# Altium PCB swivel_rev2_1.PcbDoc
Units mm, origin at the board's own origin, x right, y up, seen from the top; angles counter-clockwise.
Board outline 50 x 70 mm, 2 copper layers (Top Layer, Bottom Layer); 44 components, 36 nets, 174 pads, 19 vias.
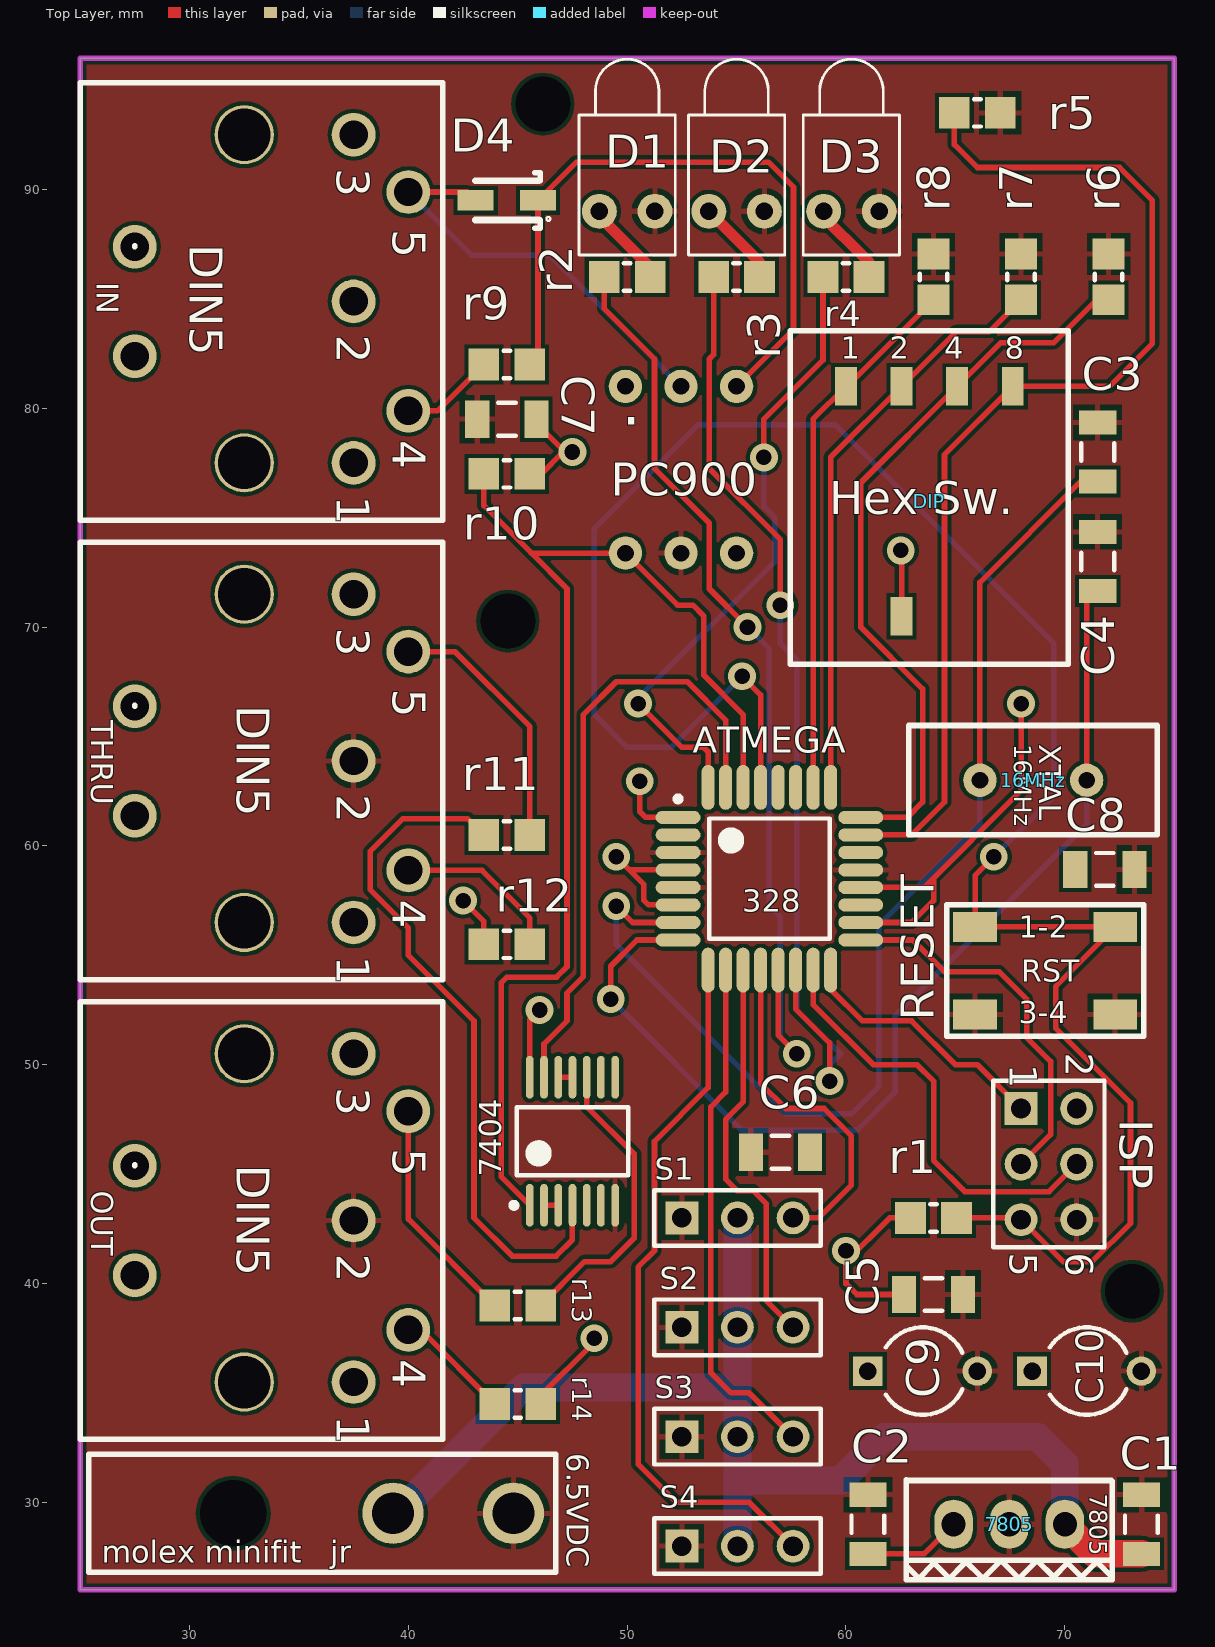
[diagram p0: Top Layer view]
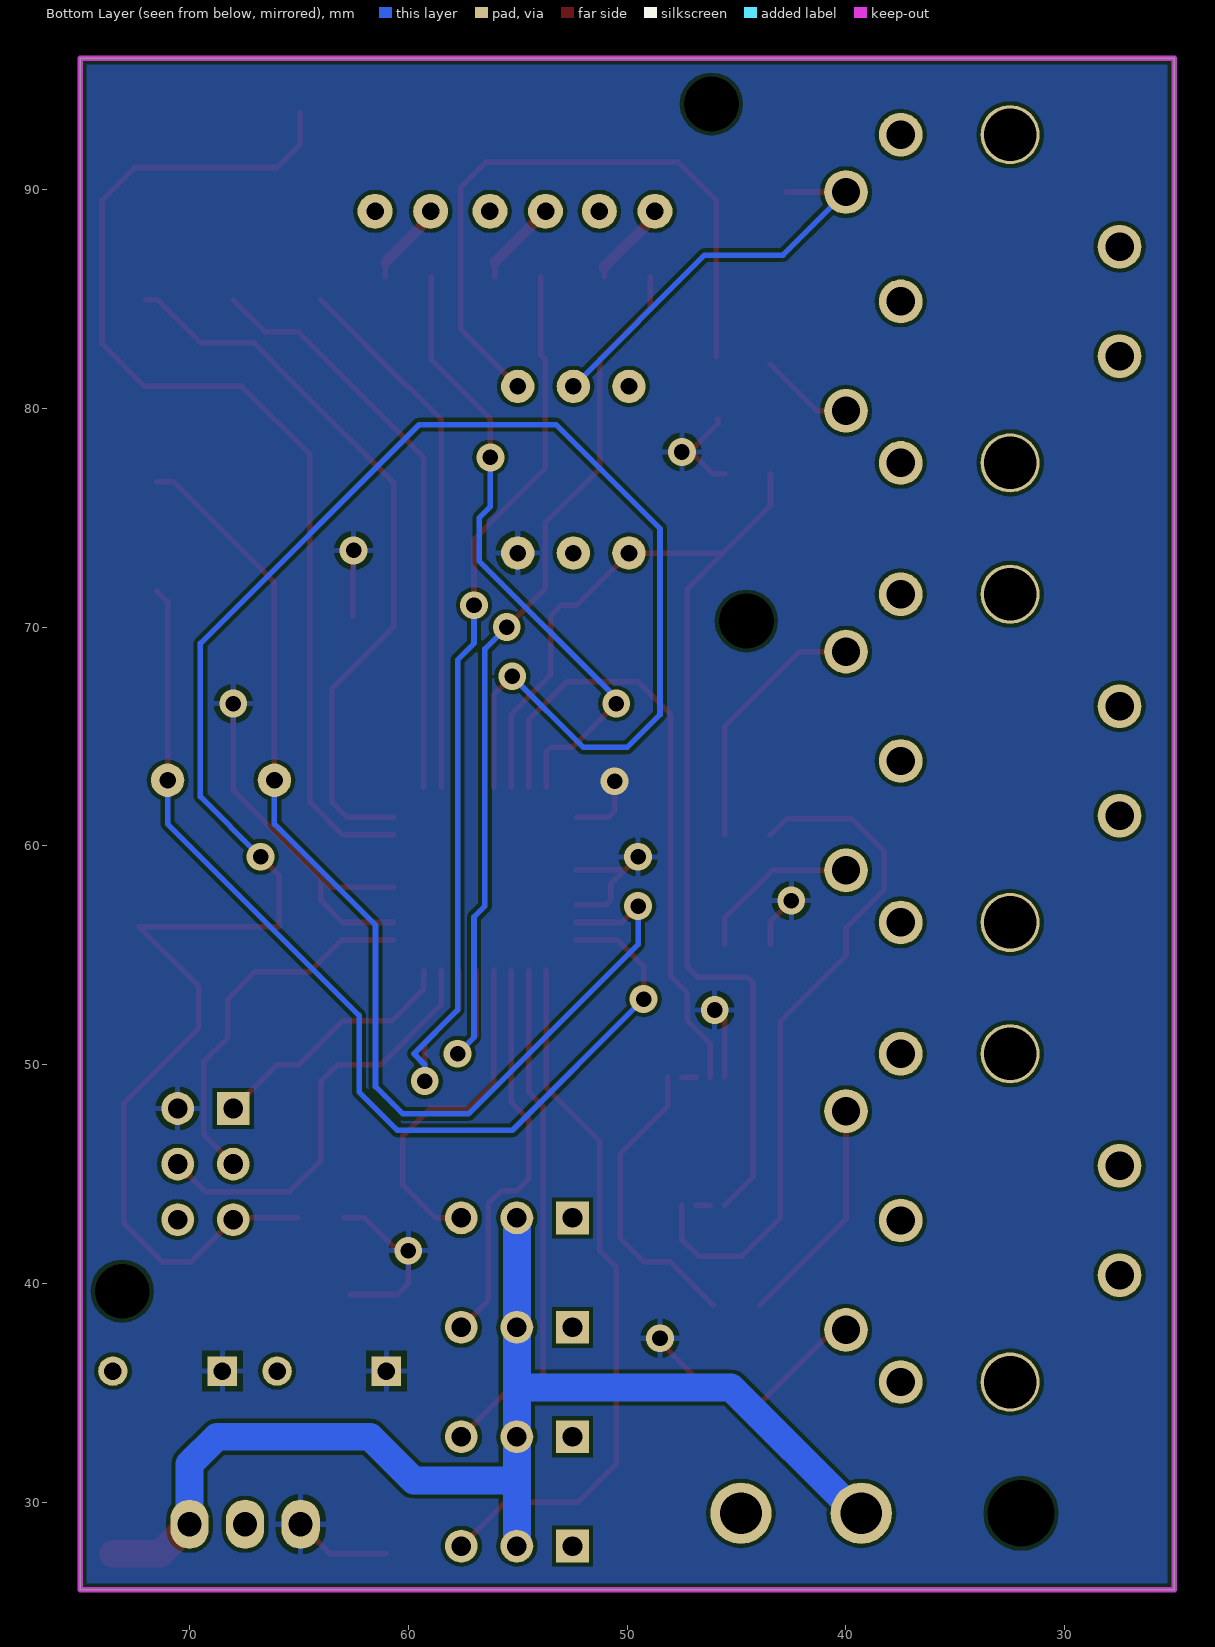
[diagram p1: Bottom Layer view, seen from below]

## Layer stack, top to bottom
Top Layer: signal copper 0.0356
Dielectric: dielectric 0.32, FR-4, Dk 4.8
Bottom Layer: signal copper 0.0356

## Board outline
25,96 75,96 75,26 25,26

## Design rules (kind name [scope] priority, off if disabled: settings)
Clearance [All] p1: gap=0.178
PolygonConnect [All] p1: connectstyle=Relief reliefconductorwidth=0.254 reliefentries=4 polygonreliefangle="90 Angle" airgapwidth=0.254
RoutingVias [All] p1: holewidth=0.711 width=1.27 viastyle="Through Hole" minholewidth=0.711 minwidth=1.27 maxholewidth=0.711 maxwidth=1.27
SilkscreenOverComponentPads [All] p1: minsilkscreentomaskgap=0.254
SolderMaskExpansion [All] p1: expansion=0.102
Width [All] p1: maxlimit=1.27 minlimit=0.254 preferedwidth=0.254
27 further rules are at their usual default settings.

## Components (designator, comment, footprint, x,y, rotation, side; value= is the part's Value field where it differs from the comment)
6.5VDC "Big Molex" "2-Pin Big Molex" 32,29.5 r270 top (schematic designator P_IN)
16MHz "XTAL" XTAL 71,63 r180 top
7404 "7404" "7404 TSSOP" 47.5,46.5 r90 top (schematic designator "Hex Inverter")
7805 "7805" 7805 70,29 r180 top (schematic designator VREG)
ATMEGA "32 TQFP" ATMEGA328 56.5,58.5 r0 top (schematic designator AVR)
C1 "Cap Semi" C1206 73.5,29 r270 top
C2 "Cap Semi" C1206 61,29 r270 top
C3 "Cap Semi" C1206 71.5,78 r90 top
C4 "Cap Semi" C1206 71.5,73 r90 top
C5 "Cap Semi" C1206 64,39.5 r180 top
C6 "Cap Semi" C1206 57,46 r0 top
C7 "Cap Semi" C1206 44.5,79.5 r0 top
C8 "Cap Semi" C1206 71.825,58.925 r180 top
C9 "Cap2" CAPR5-4X5 63.5,36 r0 top
C10 "Cap2" CAPR5-4X5 71,36 r0 top
D1 "LED1" LED-1 50,89 r90 top
D2 "LED1" LED-1 55,89 r90 top
D3 "LED1" LED-1 60.25,89 r90 top
D4 "1N4148" 1N4148W-FDITR-ND 44.5,89.5 r180 top
DIP "Dip_hex" DIP_Hex 60,81 r0 top
IN "DIN5" DIN5 37.5,92.5 r270 top (schematic designator "MIDI IN")
ISP "Header 3X2" HDR2X3 68,48 r270 top
OUT "DIN5" DIN5 37.5,50.5 r270 top (schematic designator "MIDI OUT")
PC900 "PC900" PC900 55,81 r180 top (schematic designator OPTO)
r1 "10k" "Resistor 0805" 64,43 r180 top
r2 "220" "Resistor 0805" 50,86 r0 top
r3 "220" "Resistor 0805" 55,86 r0 top
r4 "220" "Resistor 0805" 60,86 r0 top
r5 "10k" "Resistor 0805" 66,93.5 r0 top
r6 "10k" "Resistor 0805" 72,86 r90 top
r7 "10k" "Resistor 0805" 68,86 r90 top
r8 "10k" "Resistor 0805" 64,86 r90 top
r9 "220" "Resistor 0805" 44.5,82 r0 top
r10 "270" "Resistor 0805" 44.5,77 r0 top
r11 "220" "Resistor 0805" 44.5,60.5 r0 top
r12 "220" "Resistor 0805" 44.5,55.5 r0 top
r13 "220" "Resistor 0805" 45,39 r0 top
r14 "220" "Resistor 0805" 45,34.5 r0 top
RESET "RESET" Reset 67,53 r0 top (schematic designator RST)
S1 "Header 3" HDR1X3 52.5,43 r0 top (schematic designator P4)
S2 "Header 3" HDR1X3 52.5,38 r0 top (schematic designator P3)
S3 "Header 3" HDR1X3 52.5,33 r0 top (schematic designator P2)
S4 "Header 3" HDR1X3 52.5,28 r0 top (schematic designator P1)
THRU "DIN5" DIN5 37.5,71.5 r270 top (schematic designator "MIDI THRU")

## Footprints (in the part's own frame and the unit in brackets; to place one, negate y for a bottom-side part, rotate by r counter-clockwise, add the part's x,y. Pads: shape width x height; smd on the part's side, far side on the other; paste and mask are expansions set on the pad)
1N4148W-FDITR-ND [mm] "Digikey part 1N4148W-FDITR-ND diode"
  rect 1.65x0.95 smd: 1(-1.425,0) 2(1.425,0)
  silkscreen extent -1.99,-1.27 1.45,1.27, body extent -1.43,-0.85 1.42,0.85, height 1.35
"2-Pin Big Molex" [mm] "Molex 70555-0037"
  round 2.8 hole 1.905: 1(0,7.3) 2(0,12.802)
  round 0 hole 3.048 unplated: ""(0,0)
  silkscreen extent -2.7,-6.6 2.7,14.73
"7404 TSSOP" [mm] "TSOP, 14-Leads, Body 5.1x4.5mm (max), Pitch 0.65mm, IPC Medium Density"
  oval 1.95x0.35 smd: 1(-2.925,1.95) 2(-2.925,1.3) 3(-2.925,0.65) 4(-2.925,0) 5(-2.925,-0.65) 6(-2.925,-1.3) 7(-2.925,-1.95) 8(2.925,-1.95) 9(2.925,-1.3) 10(2.925,-0.65) 11(2.925,0) 12(2.925,0.65) 13(2.925,1.3) 14(2.925,1.95)
  silkscreen extent -3.05,-2.55 1.55,2.8, body extent -2.25,-2.55 2.25,2.55, height 1.1
7805 [mm] "to220 package"
  oval 1.75x2.25 hole 1.1: COM(2.54,0) IN(0,0) OUT(5.08,0)
  silkscreen extent -2.16,-2.03 7.24,2.54
ATMEGA328 [mm] "TQFP, 32-Leads, Body 9.3x9.3mm (max), Pitch 0.80mm, IPC Low Density"
  oval 2.05x0.6 smd: 1(-4.175,2.8) 2(-4.175,2) 3(-4.175,1.2) 4(-4.175,0.4) 5(-4.175,-0.4) 6(-4.175,-1.2) 7(-4.175,-2) 8(-4.175,-2.8) 17(4.175,-2.8) 18(4.175,-2) 19(4.175,-1.2) 20(4.175,-0.4) 21(4.175,0.4) 22(4.175,1.2) 23(4.175,2) 24(4.175,2.8)
  oval 0.6x2.05 smd: 9(-2.8,-4.175) 10(-2,-4.175) 11(-1.2,-4.175) 12(-0.4,-4.175) 13(0.4,-4.175) 14(1.2,-4.175) 15(2,-4.175) 16(2.8,-4.175) 25(2.8,4.175) 26(2,4.175) 27(1.2,4.175) 28(0.4,4.175) 29(-0.4,4.175) 30(-1.2,4.175) 31(-2,4.175) 32(-2.8,4.175)
  silkscreen extent -4.3,-2.75 2.75,3.77, body extent -3.5,-3.5 3.5,3.5, height 1.2
C1206 [mm] "Chip Capacitor, Body 3.2x1.6mm, IPC High Density"
  rect 1.1x1.7 smd: 1(-1.35,0) 2(1.35,0)
  silkscreen extent -0.4,-0.75 0.4,0.75, body extent -1.7,-0.9 1.7,0.9, height 1.3
CAPR5-4X5 [mm] "Capacitor; 2 Leads"
  rect 1.35x1.35 hole 0.8: 1(-2.5,0)
  round 1.35 hole 0.8: 2(2.5,0)
  silkscreen extent -1.69,-2 1.82,2
DIN5 [mm] "SDS-51J Digi: CP-2350-ND"
  round 2 hole 1.3: 1(15,0) 2(7.62,0) 3(0,0) 4(12.62,2.5) 5(2.62,2.5) 6(5.12,-10) 7(10.12,-10)
  round 2.7 hole 2.4: 8(0,-5) 9(15,-5)
  silkscreen extent -2.38,-12.5 17.62,4.06
DIP_Hex [mm] "Digi part 360 2212 2 ND"
  rect 1x1.75 smd: 1(0,0) 1(0,0) 2(2.54,0) 4(5.08,0) 8(7.62,0) C(2.54,-10.5)
  silkscreen extent -2.54,-12.7 10.16,2.54
HDR1X3 [mm] "Connector; Header; 3 Position"
  rect 1.5x1.5 hole 0.9: 1(0,0)
  round 1.5 hole 0.9: 2(2.54,0) 3(5.08,0)
  silkscreen extent -1.27,-1.27 6.35,1.27
HDR2X3 [mm] "Connector; Header; 3x2 Position"
  rect 1.5x1.5 hole 0.9: 1(0,0)
  round 1.5 hole 0.9: 2(0,2.54) 3(2.54,0) 4(2.54,2.54) 5(5.08,0) 6(5.08,2.54)
  silkscreen extent -1.27,-1.27 6.35,3.81
LED-1 [mm] "LED; 2 Leads"
  round 1.6 hole 0.8: 1(0,1.27) 2(0,-1.27)
  silkscreen extent -2,-2.2 6.95,2.2
PC900 [mil] "DIP6 Optoisolator"
  round 60 hole 30: 1(0,0) 2(100,0) 3(200,0) 4(0,300) 5(100,300) 6(200,300)
Reset [mm] "SMD Switch"
  rect 2x1.375 smd: 1(-1.1,3.3) 2(5.3,3.3) 3(-1.1,-0.7) 4(5.3,-0.7)
  silkscreen extent -2.4,-1.7 6.6,4.3
"Resistor 0805" [mm] "Chip Resistor, 2-Leads, Body 2.0x1.3mm, IPC Low Density"
  rect 1.4x1.45 smd: 1(-1.05,0) 2(1.05,0)
  silkscreen extent -0.15,-0.63 0.15,0.63, body extent -1.1,-0.67 1.1,0.67, height 0.7
XTAL [mil] "HC49"
  round 60 hole 30: 1(0,0) 2(192.13,0)
  silkscreen extent -127,-98 320,98

## Part data
6.5VDC: library part "2-Pin Big Molex", "Molex 39-30-1020"
C1 C2 C3 C4 C5 C6 C7 C8: "Capacitor (Semiconductor SIM Model)"
C9 C10: "Capacitor"
D1 D2 D3: "Typical RED GaAs LED"
ISP: "Header, 3-Pin, Dual row"
r1 r2 r3 r4 r5 r6 r7 r8 r9 r10 r11 r12 r13 r14: library part res0805
S1 S2 S3 S4: "Header, 3-Pin"

## Free pads (board coordinates)
  round 1.524 hole 2.5: 0(44.55,70.275) 0(46.15,93.9) 0(73.075,39.65)

## Via types
v1: diameter 1.27, hole 0.711, Top Layer to Bottom Layer, 19 vias

## Nets (pads, with @x,y where several pads share a name; then routed paths per layer and width w, separated by ;. In a path a pad name is that pad's centre, name@x,y a point inside that pad or via, vN(x,y) a via of type N, cw(c..) or ccw(c..) an arc to the next point about the centre after c; other vN are vias at no path point)
CAT: D4.2 IN.5 PC900.2 | length 18.8
  Top Layer w0.254: IN.5 D4.2@42.695,89.88
  Bottom Layer w0.254: IN.5 42.88,87 46.46,87 PC900.2
GND: 6.5VDC.2 7404.7 7805.COM ATMEGA.3 ATMEGA.5 ATMEGA.21 C1.1 C2.1 C3.2 C4.2 C5.1 C6.1 C7.1 C8.1 C9.2 C10.2 D1.2 D2.2 D3.2 ISP.6 OUT.2 PC900.5 r5.2 r6.2 r7.2 r8.2 RESET.3 RESET.4 S1.1 S2.1 S3.1 S4.1 THRU.2
MISO: ATMEGA.16 ISP.1 | length 11.8
  Top Layer w0.254: ATMEGA.16 59.3,53.45 60.75,52 63,52 65,50 66,50 ISP.1
MOSI: ATMEGA.15 ISP.4 | length 19.8
  Top Layer w0.254: ATMEGA.15 58.5,52.75 61.25,50 63.25,50 64,49.25 64,45.625 65.425,44.2 69.28,44.2 ISP.4
NetAVR_13: ATMEGA.13 r2.1 | length 43.3
  Top Layer w0.254: r2.1 48.95,84.55 51.25,82.25 51.25,77.25 53.75,74.75 53.75,71.75 v1(55.5,70) ; ATMEGA.13 56.9,51.35 v1(57.75,50.5)
  Bottom Layer w0.254: v1(55.5,70) 56.5,69 56.5,57.25 57,56.75 57,51.25 v1(57.75,50.5)
NetAVR_14: ATMEGA.14 r3.1 | length 45
  Top Layer w0.254: r3.1 53.95,82.45 53.75,82.25 53.75,77.25 57,74 v1@57,71.25 ; ATMEGA.14 57.7,52.55 59.25,51 v1(59.25,49.25)
  Bottom Layer w0.254: v1(57,71) 57,69.25 57.75,68.5 57.75,52.5 59.75,50.5 59.25,50 v1(59.25,49.25)
NetAVR_32: ATMEGA.32 r4.1 | length 29.2
  Top Layer w0.254: v1(50.5,66.5) 52.5,64.5 53.5,64.5 53.7,64.3 ATMEGA.32 ; v1(56.25,77.75) 56.25,79.5 58.95,82.2 r4.1
  Bottom Layer w0.254: v1(50.5,66.5) 50.5,66.75 56.75,73 56.75,75 56.25,75.5 v1(56.25,77.75)
NetD1_1: D1.1 r2.2 | length 4
  Top Layer w0.254: r2.2 r2.2@51.05,86.45
  Top Layer w0.508: D1.1 48.73,88.77 r2.2@51.05,86.45
NetD2_1: D2.1 r3.2 | length 4
  Top Layer w0.254: r3.2 r3.2@56.05,86.68
  Top Layer w0.508: D2.1 r3.2@56.05,86.68
NetD3_1: D3.1 r4.2 | length 4
  Top Layer w0.254: r4.2 r4.2@61.05,86.68
  Top Layer w0.508: D3.1@58.73,89 r4.2@61.05,86.68
NetD4_1: D4.1 PC900.1 r9.2 | length 30.2
  Top Layer w0.254: r9.2@45.925,82.375 D4.1 47.675,91.25 56.45,91.25 57.6,90.1 57.6,83.6 PC900.1
"NetHex Inverter_2": 7404.2 7404.3 | length 0.6
  Top Layer w0.254: 7404.2 7404.3
"NetHex Inverter_4": 7404.4 r11.1 | length 32
  Top Layer w0.254: r11.1 42.7,61.25 39.75,61.25 38.25,59.75 38.25,58 40,56.25 40,55 43,52 43,43 44.75,41.25 46.75,41.25 47.5,42 7404.4
"NetHex Inverter_10": 7404.10 r13.2 | length 13.8
  Top Layer w0.254: r13.2 48.05,41 49.25,41 50.325,42.075 50.325,45.925 48.15,48.1 7404.10
"NetHex Inverter_11": 7404.11 7404.12 | length 0.7
  Top Layer w0.254: 7404.12 7404.11
"NetMIDI IN_4": IN.4 r9.1 | length 4.3
  Top Layer w0.254: IN.4 41.33,79.88 r9.1
"NetMIDI OUT_4": OUT.4 r14.1 | length 5.4
  Top Layer w0.254: OUT.4 40.57,37.88 r14.1
"NetMIDI OUT_5": OUT.5 r13.1 | length 10.5
  Top Layer w0.254: OUT.5 40,42.95 r13.1
"NetMIDI THRU_4": r12.2 THRU.4 | length 7.7
  Top Layer w0.254: THRU.4 43.37,58.88 45.55,56.7 r12.2
"NetMIDI THRU_5": r11.2 THRU.5 | length 11.9
  Top Layer w0.254: THRU.5 42.12,68.88 45.55,65.45 r11.2
RST: ATMEGA.29 ISP.5 r1.1 RESET.1 RESET.2 | length 96.2
  Top Layer w0.254: v1(55.25,67.75) 56.1,66.9 ATMEGA.29 ; r1.1 67.92,43 ISP.5 69.92,41 71.25,41 73,42.75 73,48.25 69.575,51.675 69.575,53.575 RESET.2 RESET.1 65.9,58.65 v1(66.75,59.5)
  Bottom Layer w0.254: v1(55.25,67.75) 52,64.5 50,64.5 48.5,66 48.5,74.5 53.25,79.25 59.5,79.25 69.5,69.25 69.5,62.25 v1(66.75,59.5)
RX: 7404.1 ATMEGA.30 PC900.6 r10.1 | length 55.8
  Top Layer w0.254: r10.1 43.45,75.55 45.62,73.38 ; 7404.1 44.25,44.875 44.25,53.75 44.5,54 46.775,54 47.25,54.475 47.25,71.75 45.62,73.38 ; ATMEGA.30 55.3,66 53.5,67.8 53.5,70.5 53,71 52.3,71 PC900.6 45.62,73.38
S1: ATMEGA.9 S4.3 | length 32.5
  Top Layer w0.254: ATMEGA.9 53.7,48.95 51.25,46.5 51.25,41.5 50.5,40.75 50.5,31.75 52.25,30 55.58,30 S4.3
S2: ATMEGA.10 S3.3 | length 23.6
  Top Layer w0.254: ATMEGA.10 54.5,48.75 53.825,48.075 53.825,35.925 54.75,35 55.58,35 S3.3
S3: ATMEGA.11 S2.3 | length 18.4
  Top Layer w0.254: ATMEGA.11 55.3,48.3 54.5,47.5 54.5,44.775 55.025,44.25 55.75,44.25 56.35,43.65 56.35,39.23 S2.3
S4: ATMEGA.12 S1.3 | length 15.9
  Top Layer w0.254: ATMEGA.12 56.1,49.15 57.25,48 59,48 60.25,46.75 60.25,44.5 58.75,43 S1.3
SCK: ATMEGA.17 ISP.3 | length 17.2
  Top Layer w0.254: ATMEGA.17 63.05,55.7 64.5,54.25 67,54.25 68.25,53 68.25,51.25 69.35,50.15 69.35,46.81 ISP.3
SPOW: 6.5VDC.1 7805.IN C1.2 S1.2 S2.2 S3.2 S4.2 | length 56.2
  Top Layer w1.27: 7805.IN 71.35,27.65 C1.2
  Bottom Layer w1.27: 6.5VDC.1 39.5,29.5 45.25,35.25 55.04,35.25 ; S4.2 55.04,31 ; S1.2 S2.2 55.04,35.25 ; 7805.IN 70,31.75 68.75,33 61.75,33 59.75,31 55.04,31 ; 55.04,31 S3.2 55.04,35.25
SW1: ATMEGA.23 DIP.8 r5.1 | length 50
  Top Layer w0.254: ATMEGA.23 63,60.5 64.5,62 64.5,77.88 DIP.8 72.05,81 74,82.95 74,89.5 72.5,91 66,91 64.95,92.05 r5.1
SW2: ATMEGA.24 DIP.4 r6.1 | length 33.7
  Top Layer w0.254: ATMEGA.24 62.8,61.3 63.5,62 63.5,67.175 60.675,70 60.675,76.595 DIP.4 67.08,83 69.5,83 71.45,84.95 r6.1
SW3: ATMEGA.25 DIP.2 r7.1 | length 26.8
  Top Layer w0.254: ATMEGA.25 59.3,77.76 DIP.2 65.04,83.5 66.55,83.5 r7.1
SW4: ATMEGA.26 DIP.1 r8.1 | length 24.6
  Top Layer w0.254: ATMEGA.26 58.5,79.5 60,81 60.05,81 r8.1
TX: 7404.13 ATMEGA.31 | length 28.2
  Top Layer w0.254: 7404.13 46.2,50.95 47.25,52 47.25,53.275 48,54.025 48,66 49.5,67.5 52.75,67.5 54.5,65.75 ATMEGA.31
VCC: 7404.14 7805.OUT ATMEGA.4 ATMEGA.6 ATMEGA.18 ATMEGA.20 C2.2 C5.2 C6.2 C7.2 C8.2 C9.1 C10.1 DIP.C ISP.2 PC900.4 r1.2 r10.2 r12.1 r14.2 | length 52.6
  Top Layer w0.254: v1(42.5,57.5) 43.45,56.55 r12.1 ; 7404.14 45.55,52.05 ; r10.2 46.075,77 47.075,78 v1(47.5,78) 47.15,78 45.85,79.3 C7.2 ; r14.2@46.025,34.85 v1@48.475,37.3 ; v1(49.5,59.5) 50.1,58.9 ; ATMEGA.6 50.975,57.3 50.75,57.525 50.75,58.25 50.1,58.9 ; ATMEGA.4 50.1,58.9 ; ATMEGA.18 63,56.5 64,57.5 64,58.525 ; ATMEGA.20 63.575,58.1 68,62.525 v1(68,66.5) ; C2.2 63.57,27.65 7805.OUT ; DIP.C v1@62.54,73.46 ; C5.2 60.5,39.5 60,40 60,41 62,43 r1.2
  other v1: 48.5,37.5 60,41.5 46,52.5 62.5,73.5
XTAL1: 16MHz.2 ATMEGA.7 C3.1 | length 52.9
  Top Layer w0.254: v1(49.5,57.25) 50.25,56.5 ATMEGA.7 ; 16MHz.2 66.12,72.045 70.725,76.65 C3.1
  Bottom Layer w0.254: v1(49.5,57.25) 49.5,55.5 57.25,47.75 60.25,47.75 61.5,49 61.5,56.38 66.12,61 16MHz.2
XTAL2: 16MHz.1 ATMEGA.8 C4.1 | length 48
  Top Layer w0.254: v1(49.25,53) 49.25,54.5 50.45,55.7 ATMEGA.8 ; 16MHz.1 71,71.15 C4.1
  Bottom Layer w0.254: v1(49.25,53) 55.25,47 60.5,47 62.25,48.75 62.25,52.25 71,61 16MHz.1
pads on no net: 6.5VDC. 7404.5 7404.6 7404.8 7404.9 ATMEGA.1 ATMEGA.2 ATMEGA.19 ATMEGA.22 ATMEGA.27 ATMEGA.28 IN.1 IN.2 IN.3 IN.6 IN.7 IN.8 IN.9 OUT.1 OUT.3 OUT.6 OUT.7 OUT.8 OUT.9 PC900.3 THRU.1 THRU.3 THRU.6 THRU.7 THRU.8 THRU.9
copper on no net: | length 3.2
  Top Layer w0.254: v1(50.575,62.95) 50.575,61.575 50.85,61.3 52.325,61.3

## Polygon pours and split planes (outlines as drawn)
VCC on Bottom Layer "Top Layer-No Net" (solid, pour order 8): 25,26 75,26 75,96 25,96
GND on Top Layer "Top Layer-No Net" (solid, pour order 10): 25,26 75,26 75,96 25,96

## Keep-outs
Keep-Out Layer:
  the board outline again, w0.254

## Silkscreen, mask and mechanical layers (free items; w line width, h text height)
Top Overlay:
  text "1" at 59.75,82.25 h1.02
  text "2" at 62,82.25 h1.02
  text "4" at 64.5,82.25 h1.02
  text "8" at 67.25,82.25 h1.02
  text "." at 49.75,79.25 h2.03
  text "328" at 55.25,57 h1.02
  text "molex minifit   jr" at 26,27.25 h1.02

## Text inside footprints (layer, text, board x,y; h text height)
DIP: Top Overlay "Hex Sw." at 59.238,75.158 h1.52
IN: Top Overlay "1" at 36.738,75.99 h1.52 r270; Top Overlay "3" at 36.738,90.976 h1.52 r270; Top Overlay "2" at 36.738,83.356 h1.52 r270; Top Overlay "4" at 39.278,78.53 h1.52 r270; Top Overlay "5" at 39.278,88.182 h1.52 r270
ISP: Top Overlay "6" at 70.032,41.396 h1.27 r270; Top Overlay "5" at 67.492,41.396 h1.27 r270; Top Overlay "2" at 70.032,50.54 h1.27 r270; Top Overlay "1" at 67.492,50.032 h1.27 r270
OUT: Top Overlay "1" at 36.738,33.99 h1.52 r270; Top Overlay "3" at 36.738,48.976 h1.52 r270; Top Overlay "2" at 36.738,41.356 h1.52 r270; Top Overlay "4" at 39.278,36.53 h1.52 r270; Top Overlay "5" at 39.278,46.182 h1.52 r270
RESET: Top Overlay "3-4" at 67.9,51.9 h1; Top Overlay "1-2" at 67.9,55.8 h1; Top Overlay "RST" at 68,53.8 h1
THRU: Top Overlay "1" at 36.738,54.99 h1.52 r270; Top Overlay "3" at 36.738,69.976 h1.52 r270; Top Overlay "2" at 36.738,62.356 h1.52 r270; Top Overlay "4" at 39.278,57.53 h1.52 r270; Top Overlay "5" at 39.278,67.182 h1.52 r270